# EAGLE board fényjelző_mego (EAGLE 6.1)
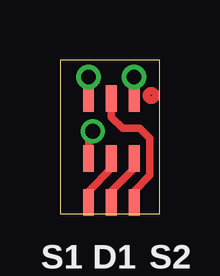
[diagram p0: board, top side]
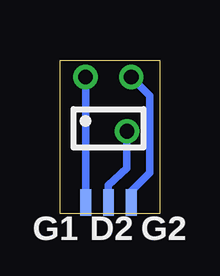
[diagram p1: board, bottom side, seen from below]

Size 4.16 x 6.41 mm. Coordinates in mm from the lower left corner, seen from the top.
Outline: 0,0 4.16,0 4.16,6.41 0,6.41 0,0
Copper layers (1*16): Top 0.035mm / dielectric 1.5mm / Bottom 0.035mm
Design rules: minimum track width 10mil, minimum drill 24mil, track to track 10mil, track to pad 10mil, pad to pad 10mil, via to via 10mil, smd to smd 0mil, copper to edge 10mil, drill to drill 8mil, minimum pad ring 10mil, minimum via ring 8mil, stop-mask expansion 4mil, vias tented up to drill 0mil, thermal gap 10mil

## Footprints (pad centres in the part's own frame; a part is rotated, then mirrored left to right if it is on the bottom)
PAD_SMD_KICSI = smd 0.45 x 1.1: P$4 0,0
SOT26 = smd 0.45 x 1.1: P$1 -0.95,-1.25; P$2 0,-1.25; P$3 0.95,-1.25; P$4 0.95,1.25; P$5 0,1.25; P$6 -0.95,1.25

## Placement (x,y rotation side)
D1  PADSMD_KICSI  [PAD_SMD_KICSI]  2.14,0.47 0 top
D2  PADSMD_KICSI  [PAD_SMD_KICSI]  2.14,0.47 0 bottom
G1  PADSMD_KICSI  [PAD_SMD_KICSI]  3.09,0.47 0 bottom
G2  PADSMD_KICSI  [PAD_SMD_KICSI]  1.19,0.47 0 bottom
S1  PADSMD_KICSI  [PAD_SMD_KICSI]  1.19,0.47 0 top
S2  PADSMD_KICSI  [PAD_SMD_KICSI]  3.09,0.47 0 top
U$1  AP2625GY-HF-3SOT26  [SOT26]  2.14,3.56 180 top

## Library data of the parts
D1 D2 G1 G2 S1 S2 U$1 = narval

## Nets
N$1: G1.P$4 U$1.P$1
N$2: S1.P$4 U$1.P$5
N$3: D1.P$4 U$1.P$6
N$4: G2.P$4 U$1.P$3
N$5: S2.P$4 U$1.P$2
N$6: D2.P$4 U$1.P$4

## Tracks (layer width: path | path; a pad name or v marks a point on that pad's centre or on a via)
N$1  (via drill 0.61)
  Top 0.305: U$1.P$1 v3.09,5.7
  Bottom 0.305: v3.09,5.7 G1.P$4
N$2
  Top 0.305: U$1.P$5 2.14,1.9 1.19,0.95 S1.P$4
N$3
  Top 0.305: D1.P$4 2.14,0.95 3.09,1.9 U$1.P$6
N$4  (via drill 0.61)
  Top 0.305: 1.19,4.75 U$1.P$3 v1.19,5.7
  Bottom 0.305: v1.19,5.7 0.42,4.93 0.42,1.72 1.19,0.95 G2.P$4
N$5
  Top 0.305: S2.P$4 3.09,0.95 3.74,1.6 3.74,3.15 3.33,3.56 2.61,3.56 2.14,4.04 U$1.P$2
N$6  (via drill 0.61)
  Top 0.305: U$1.P$4 1.19,3.27 v1.37,3.44
  Bottom 0.305: v1.37,3.44 1.37,1.9 2.14,1.19 D2.P$4
(copper drawn outside any net)
  shapes: Top circle x1